# Altium PCB Ttem_Lumineux.PcbDoc
Units mil, origin at the board's own origin, x right, y up, seen from the top; angles counter-clockwise.
Board outline 6000 x 4000 mil, 2 copper layers (Top Layer, Bottom Layer); 53 components, 48 nets, 213 pads, 5 vias.
Unrouted connection lines stored in the file: 138.
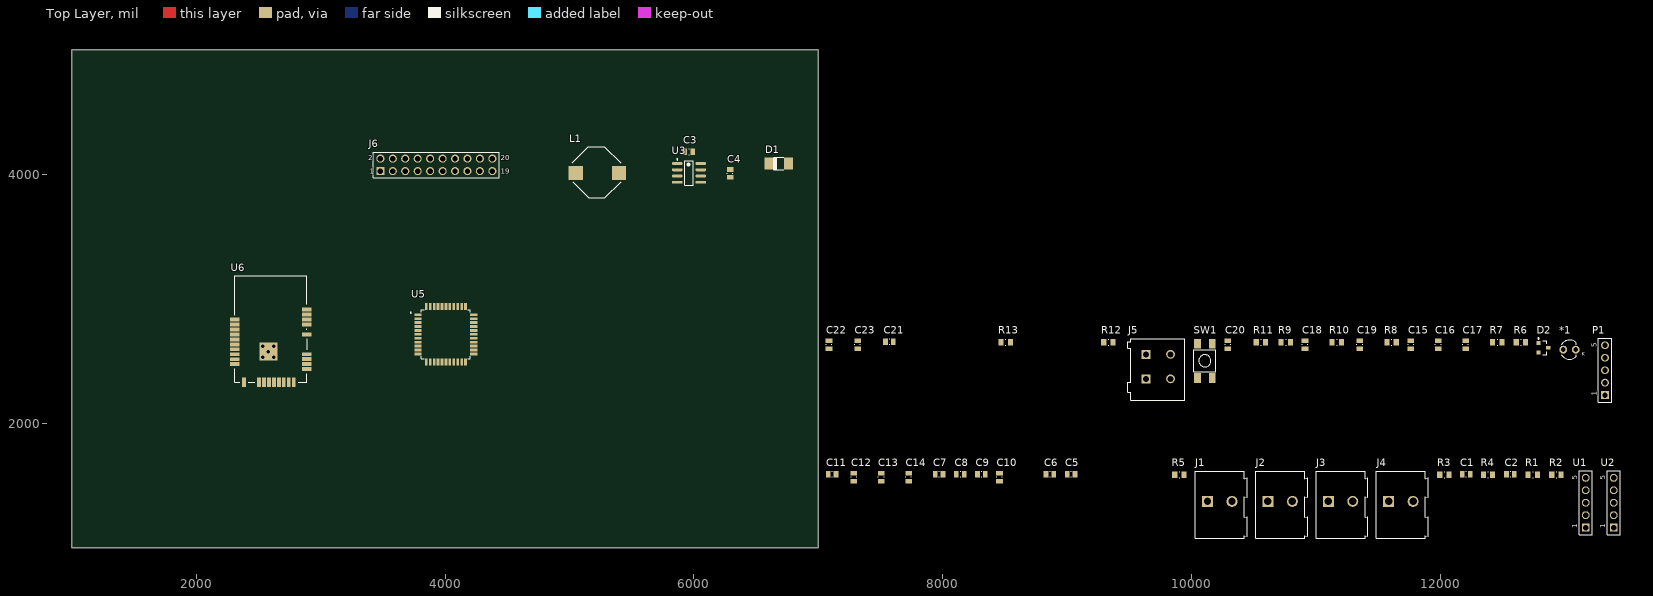
[diagram p0: Top Layer view]
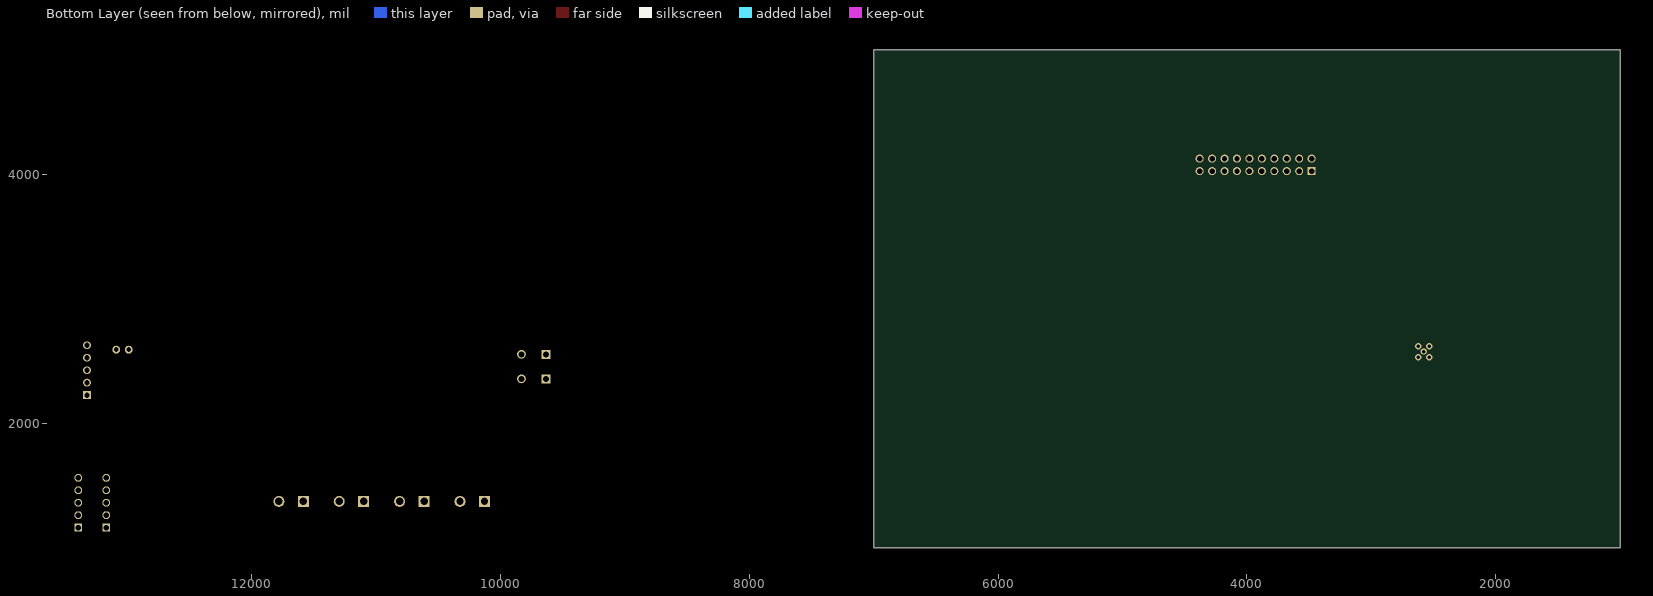
[diagram p1: Bottom Layer view, seen from below]

## Layer stack, top to bottom
Top Solder: solder mask 0.4, Solder Resist, Dk 3.5
Top Layer: signal copper 1.4
Dielectric 1: dielectric 12.6, FR-4, Dk 4.8
Bottom Layer: signal copper 1.4
Bottom Solder: solder mask 0.4, Solder Resist, Dk 3.5

## Board outline
1000,1000 7000,1000 7000,5000 1000,5000

## Design rules (kind name [scope] priority, off if disabled: settings)
Clearance [All] p1: gap=10 ignorepadtopadclearanceinfootprint=FALSE except(0: Arc-Hole Track-Hole SMDPad-Hole THPad-Hole Via-Hole Fill-Hole Poly-Hole Region-Hole Text-Hole)
PolygonConnect [All] p1: connectstyle=Relief reliefconductorwidth=10 reliefentries=4 polygonreliefangle="90 Angle" airgapwidth=10
RoutingVias [All] p1: holewidth=28 width=50 viastyle="Through Hole" minholewidth=28 minwidth=50 maxholewidth=28 maxwidth=50
SolderMaskExpansion [All] p1: expansion=4
Width [All] p1: maxlimit=10 minlimit=10 preferedwidth=10
30 further rules are at their usual default settings.

## Classes and differential pairs
component class Pic: *1 C15 C16 C17 C18 C19 C20 C21 C22 C23 D2 J5 P1 R6 R7 R8 R9 R10 R11 R12 R13 SW1 U5 U6
component class Alim: C1 C2 C3 C4 C5 C6 C7 C8 C9 C10 C11 C12 C13 C14 D1 J1 J2 J3 J4 J6 L1 R1 R2 R3 R4 R5 U1 U2 U3

## Components (designator, comment, footprint, x,y, rotation, side; value= is the part's Value field where it differs from the comment)
*1 "TEPT4400" "Type 3mm" 13035,2590 r0 top
C1 "39nF" CAPC0805(2012)155_L 12205,1590 r0 top value=4.7uF
C2 "39nF" CAPC0805(2012)155_L 12560,1590 r0 top value=4.7uF
C3 "10nF" CAPC0805(2012)155_L 5958.5,4180 r0 top value=4.7uF
C4 "100uf pol" CAPC0805(2012)155_L 6290,4006.5 r90 top value=4.7uF
C5 "100n" CAPC0805(2012)155_L 9030,1590 r0 top value=4.7uF
C6 "100uF pol" CAPC0805(2012)155_L 8860,1590 r0 top value=4.7uF
C7 "47uF" CAPC0805(2012)155_L 7970,1590 r0 top value=4.7uF
C8 "47uF" CAPC0805(2012)155_L 8140,1590 r0 top value=4.7uF
C9 "47uF" CAPC0805(2012)155_L 8310,1590 r0 top value=4.7uF
C10 "47uF" CAPC0805(2012)155_L 8455,1565 r90 top value=4.7uF
C11 "47uF" CAPC0805(2012)155_L 7110,1590 r0 top value=4.7uF
C12 "47uF" CAPC0805(2012)155_L 7285,1565 r90 top value=4.7uF
C13 "47uF" CAPC0805(2012)155_L 7505,1565 r90 top value=4.7uF
C14 "47uF" CAPC0805(2012)155_L 7725,1565 r90 top value=4.7uF
C15 "100n" CAPC0805(2012)155_L 11760,2630 r90 top value=4.7uF
C16 "100n" CAPC0805(2012)155_L 11980,2630 r90 top value=4.7uF
C17 "100n" CAPC0805(2012)155_L 12200,2630 r90 top value=4.7uF
C18 "" CAPC0805(2012)155_L 10910,2630 r90 top value=4.7uF
C19 "100n" CAPC0805(2012)155_L 11350,2630 r90 top value=4.7uF
C20 "100n" CAPC0805(2012)155_L 10290,2630 r90 top value=4.7uF
C21 "10u" CAPC0805(2012)155_L 7570,2655 r0 top value=4.7uF
C22 "100n" CAPC0805(2012)155_L 7085,2630 r90 top value=4.7uF
C23 "100n" CAPC0805(2012)155_L 7315,2630 r90 top value=4.7uF
D1 "SK32" DO-214AC 6680.28,4085 r0 top
D2 "BAS40-06LT1G" ONSC-SOT-23-3-318-08_V 12825,2605 r0 top
J1 "691211720002" 691211720002 10225,1345 r0 top
J2 "691211720002" 691211720002 10710,1345 r0 top
J3 "691211720002" 691211720002 11195,1345 r0 top
J4 "691211720002" 691211720002 11680,1345 r0 top
J5 "691411710002B" 691411710002B 9715,2430 r0 top
J6 "61302021121" 61302021121 3930,4075 r0 top
L1 "DO3308P-684" DO3308P 5340,4010 r180 top
P1 "61300511121" 61300511121 13320,2425 r90 top
R1 "47R" RESC0805(2012)_N 12740,1585 r0 top value="1000000.00 Ohm"
R2 "47R" RESC0805(2012)_N 12930,1585 r0 top value="1000000.00 Ohm"
R3 "270R" RESC0805(2012)_N 12030,1585 r0 top value="1000000.00 Ohm"
R4 "270R" RESC0805(2012)_N 12380,1585 r0 top value="1000000.00 Ohm"
R5 "shunt 0,2R max" RESC0805(2012)_N 9900,1585 r0 top value="1000000.00 Ohm"
R6 "" RESC0805(2012)_N 12645,2650 r0 top value="1000000.00 Ohm"
R7 "82k" RESC0805(2012)_N 12455,2650 r0 top value="1000000.00 Ohm"
R8 "" RESC0805(2012)_N 11605,2650 r0 top value="1000000.00 Ohm"
R9 "" RESC0805(2012)_N 10755,2650 r0 top value="1000000.00 Ohm"
R10 "18k" RESC0805(2012)_N 11165,2650 r0 top value="1000000.00 Ohm"
R11 "300R" RESC0805(2012)_N 10555,2650 r0 top value="1000000.00 Ohm"
R12 "0R" RESC0805(2012)_N 9330,2650 r0 top value="1000000.00 Ohm"
R13 "1M" RESC0805(2012)_N 8505,2650 r0 top value="1000000.00 Ohm"
SW1 "430181038816" 430181038816 10105,2500 r90 top
U1 "DC-DC _12to5V" 61300511121 13165,1360 r90 top
U2 "DC-DC _12to5V" 61300511121 13390,1360 r90 top
U3 "LM2674M-3.3" M08A_N 5960,4010 r0 top
U5 "PIC32MX130F256D" QFP80P1200X1200X120-44N 4006.77,2713.03 r0 top
U6 "ATWILC1000" ATWILC1000 2309.13,2328.15 r0 top

## Footprints (in the part's own frame and the unit in brackets; to place one, negate y for a bottom-side part, rotate by r counter-clockwise, add the part's x,y. Pads: shape width x height; smd on the part's side, far side on the other; paste and mask are expansions set on the pad)
61300511121 [mm] "Pin Header, pitch 2.54 mm, THT, Vertical, single row, 5p"
  rect 1.6x1.6 hole 1.1: 1(-5.08,0)
  round 1.6 hole 1.1: 2(-2.54,0) 3(0,0) 4(2.54,0) 5(5.08,0)
  silkscreen extent -6.5,-1.35 6.5,1.35, body extent -6.35,-1.27 6.35,1.27, height 8.57
61302021121 [mm] "Pin Header, pitch 2.54 mm, THT, Vertical, dual row, 20p"
  rect 1.65x1.65 hole 1.1: 1(-11.43,-1.27)
  round 1.65 hole 1.1: 2(-11.43,1.27) 3(-8.89,-1.27) 4(-8.89,1.27) 5(-6.35,-1.27) 6(-6.35,1.27) 7(-3.81,-1.27) 8(-3.81,1.27) 9(-1.27,-1.27) 10(-1.27,1.27) 11(1.27,-1.27) 12(1.27,1.27) 13(3.81,-1.27) 14(3.81,1.27) 15(6.35,-1.27) 16(6.35,1.27) 17(8.89,-1.27) 18(8.89,1.27) 19(11.43,-1.27) 20(11.43,1.27)
  silkscreen extent -12.85,-2.62 12.85,2.62, body extent -12.7,-2.54 12.7,2.54, height 8.59
430181038816 [mm] "4.5*4.5mm vertical type, SMD, height 3.8mm, black actuator, 160gf, T&R"
  rect 2x1.4 smd: 1(-3.5,1.5) 2(3.5,1.5) 3(-3.5,-1.5) 4(3.5,-1.5)
  silkscreen extent -2.25,-2.25 2.25,2.25, body extent -3.75,-2.25 3.75,2.25, height 3.78
691211720002 [mm] "5,00mm - modular - green -45° entry with rising cage clamp - 02p"
  rect 2.25x2.25 hole 1.5: 1(-2.5,0.65)
  round 2.25 hole 1.5: 2(2.5,0.65)
  silkscreen extent -5,-6.85 5.6,6.85, body extent -5,-6.85 5.6,6.85, height 15.72
691411710002B [mm] "5.00 mm Screwless Horizontal Entry - 2.0 mm2 Wires, 2p"
  rect 1.8x1.8 hole 1.2: 1(-2.1,-1.9) 1(-2.1,3.1)
  round 1.8 hole 1.2: 2(2.9,-1.9) 2(2.9,3.1)
  silkscreen extent -5.8,-6.3 5.8,6.3, body extent -5.8,-6.3 5.8,6.3, height 15.65
ATWILC1000 [mm]
  rect 1.9x0.8 smd: 1(14.73,2.67) 2(14.73,3.686) 3(14.73,4.702) 4(14.73,5.718) 5(14.73,9.782) 6(14.73,11.814) 7(14.73,12.83) 8(14.73,13.846) 9(14.73,14.862) 10(0,12.824) 11(0,11.808) 12(0,10.792) 13(0,9.776) 14(0,8.76) 15(0,7.744) 16(0,6.728) 17(0,5.712) 18(0,4.696) 19(0,3.68)
  rect 0.8x1.9 smd: 20(1.9,0) 21(4.948,0) 22(5.964,0) 23(6.98,0) 24(7.996,0) 25(9.012,0) 26(10.028,0) 27(11.044,0) 28(12.06,0)
  rect 3.7x3.7 smd: 29(6.88,6.27)
  silkscreen extent 0,0 14.73,21.72
CAPC0805(2012)155_L [mm] "Chip Capacitor, Body 2.0x1.2mm, Height 1.55mm, IPC High Density"
  rect 0.95x1.35 smd: 1(-0.8,0) 2(0.8,0)
  silkscreen extent -0.05,-0.58 0.05,0.58, body extent -1.1,-0.72 1.1,0.72, height 1.55
DO3308P [mm]
  rect 2.92x2.79 smd: 1(-1.46,0) 2(7.37,0)
  silkscreen extent -1.91,-5.33 8.13,5.08
DO-214AC [mm]
  rect 1.8x2.4 smd: A(2.025,0) C(-2.025,0)
  silkscreen extent -1.06,-1.3 1.02,1.3
M08A_N [mm] "SOIC, 8-Leads, Body 4.9x3.9mm, Pitch 1.27mm, IPC Medium Density"
  oval 2.2x0.6 smd: 1(-2.4,1.905) 2(-2.4,0.635) 3(-2.4,-0.635) 4(-2.4,-1.905) 5(2.4,-1.905) 6(2.4,-0.635) 7(2.4,0.635) 8(2.4,1.905)
  silkscreen extent -2.52,-2.5 0.9,2.88, body extent -2,-2.5 2,2.5, height 1.75
ONSC-SOT-23-3-318-08_V [mm] "SOT23, 3-Leads, Body 2.92x1.3mm, Pitch 0.95mm"
  rect 0.9x0.8 smd: 1(-1,0.95) 2(-1,-0.95) 3(1,0)
  silkscreen extent -1.12,-1.46 0.65,2.02, body extent -0.65,-1.46 0.65,1.46, height 1.11
QFP80P1200X1200X120-44N [mm]
  rect 1.47x0.55 smd: 1(-5.67,4) 2(-5.67,3.2) 3(-5.67,2.4) 4(-5.67,1.6) 5(-5.67,0.8) 6(-5.67,0) 7(-5.67,-0.8) 8(-5.67,-1.6) 9(-5.67,-2.4) 10(-5.67,-3.2) 11(-5.67,-4) 23(5.67,-4) 24(5.67,-3.2) 25(5.67,-2.4) 26(5.67,-1.6) 27(5.67,-0.8) 28(5.67,0) 29(5.67,0.8) 30(5.67,1.6) 31(5.67,2.4) 32(5.67,3.2) 33(5.67,4)
  rect 0.55x1.47 smd: 12(-4,-5.67) 13(-3.2,-5.67) 14(-2.4,-5.67) 15(-1.6,-5.67) 16(-0.8,-5.67) 17(0,-5.67) 18(0.8,-5.67) 19(1.6,-5.67) 20(2.4,-5.67) 21(3.2,-5.67) 22(4,-5.67) 34(4,5.67) 35(3.2,5.67) 36(2.4,5.67) 37(1.6,5.67) 38(0.8,5.67) 39(0,5.67) 40(-0.8,5.67) 41(-1.6,5.67) 42(-2.4,5.67) 43(-3.2,5.67) 44(-4,5.67)
  silkscreen extent -7.26,-5 5,5
RESC0805(2012)_N [mm] "Chip Resistor, Body 2.0x1.3mm, IPC Medium Density"
  rect 1.05x1.4 smd: 1(-0.95,0) 2(0.95,0)
  silkscreen extent -0.05,-0.6 0.05,0.6, body extent -1.1,-0.67 1.1,0.68, height 0.7
"Type 3mm" [mm] "THT, LED-3mm, 2pin- Body 4.15mm(max)"
  round 1.6 hole 1: 1(1.27,0) 2(-1.27,0)
  silkscreen extent -1.66,-1.95 1.4,1.95, body extent -1.93,-1.94 1.87,1.94, height 10.5

## Part data
C1 C2 C3 C4 C5 C6 C7 C8 C9 C10 C11 C12 C13 C14 C15 C16 C17 C18 C19 C20 C21 C22 C23: library part Capa, Case-EIA=0805, Case-Metric=2012, Rated Voltage="10 V", Tolerance=±10%, Max Thickness="1.55 mm", Technology=SMT
D1: "Shotky diod", Emitting color="Super Red", Manufacturer="Wuerth Elektronik", PartNumber=151031SS04000, ComponentLink1Description="Manufacturer URL", ComponentLink1URL=http://www.we-online.com, ComponentLink2Description=Datasheet, ComponentLink2URL=http://katalog.we-online.de/pbs/datasheet/7448042001.pdfhttp://katalog.we-online.de/pbs/datasheet/7448042001.pdfhttp://katalog.we-online.de/pbs/datasheet/7448042001.pdfhttp://katalog.we-online.de/pbs/datasheet/151031SS04000.pdf, PackageReference="Type 3mm"
D2: library part CMP-1055-00547-1, "Common Anode Schottky Barrier Diodes, 3-Pin SOT-23, Pb-Free, Tape and Reel", Manufacturer="On Semiconductor", ComponentLink1Description="Manufacturer URL", ComponentLink1URL=http://www.onsemi.com/, ComponentLink2Description=Datasheet, ComponentLink2URL=http://www.onsemi.cn/pub_link/Collateral/BAS40-06LT1-D.PDF, ComponentLink3Description="Package Specification", ComponentLink3URL=http://www.onsemi.cn/pub_link/Collateral/318-08.PDF, Configuration="Common Anode", DatasheetVersion="Rev. 8", Mounting Technology="Surface Mount", PackageDescription="3-Pin Small Outline Transistor, Body 2.92 x 1.3 mm, Pitch 0.95 mm", PackageReference=SOT-23-3-318-08, PackageVersion="Rev. AP, 11/2009", Packing="Tape and Reel", PartNumber=BAS40-06LT1G, RoHS=TRUE
J1 J2 J3 J4: library part CMP-1502-02524-1, "Serie 211 - 5.00 mm 45deg Entry Modular with Rising Cage Clamp - 15.50 mm Height WR-TBL, 2 pin", Manufacturer="Wurth Elektronik", Operating Temperature=-40to105degC, Datasheet URL=http://katalog.we-online.de/em/datasheet/6912117200xx.pdf, Manufacturer URL=http://www.we-online.de, Mounting Technology=THT, Package Reference=691211720002, Packaging=Box, Part Number=691211720002, Pin Number=2, Pitch=5.00mm, Publisher=WurthElektronik
J5: library part CMP-1502-03026-1, "Serie 411 B - 5.00mm Screwless Horizontal Entry-2.0mm2 Wires WR-TBL, 2 pin", Manufacturer="Wurth Elektronik", Operating Temperature=-40to105degC, Datasheet URL=http://katalog.we-online.de/em/datasheet/6914117100xxB.pdf, Manufacturer URL=http://www.we-online.de, Mounting Technology=THT, Package Reference=691411710002B, Packaging=Box, Part Number=691411710002B, Pin Number=2, Pitch=5.00mm, Publisher=WurthElektronik
J6: library part CMP-1502-01104-1, "THT Vertical Pin Header WR-PHD, Pitch 2.54 mm, Dual Row, 20 pins", Contact Resistance=20mOhm, Manufacturer="Wurth Elektronik", Operating Temperature=-40to105degC, Rated Current=3A, Withstanding Voltage=500VAC, Working Voltage=250VAC, Datasheet URL=https://katalog.we-online.de/em/datasheet/6130xx21121.pdf, Gender=Male, Manufacturer URL=http://www.we-online.de, Mounting Technology=THT, Orientation=Vertical, Package Reference=61302021121, Packaging=Bag, Part Number=61302021121, Pin Number=20, Pitch=2.54mm, Publisher=WurthElektronik, Row Number=Dual
P1: library part CMP-1502-01068-1, "THT Vertical Pin Header WR-PHD, Pitch 2.54 mm, Single Row, 5 pins", Contact Resistance=20mOhm, Manufacturer="Wurth Elektronik", Operating Temperature=-40to105degC, Rated Current=3A, Withstanding Voltage=500VAC, Working Voltage=250VAC, Datasheet URL=https://katalog.we-online.de/em/datasheet/6130xx11121.pdf, Gender=Male, Manufacturer URL=http://www.we-online.de, Mounting Technology=THT, Orientation=Vertical, Package Reference=61300511121, Packaging=Bag, Part Number=61300511121, Pin Number=5, Pitch=2.54mm, Publisher=WurthElektronik, Row Number=Single
R1 R2 R3 R4 R5 R6 R7 R8 R9 R10 R11 R12 R13: library part Resistor, Case-EIA=0805, Case-Metric=2012, Power="0.125 W", Tolerance="1 %", Technology=SMT
SW1: library part CMP-1454-00001-1, "WS-TASV SMD Tact Switch 4.5X4.5 mm", Manufacturer="Wuerth Elektronik", ComponentLink1Description="Manufacturer URL", ComponentLink1URL=http://www.we-online.com, ComponentLink2Description=Datasheet, ComponentLink2URL=http://katalog.we-online.de/em/datasheet/430181038816.pdf, NoPins=04, PackageReference=430181038816, PartNumber=430181038816
U3: library part CMP-0069-00679-2, "SIMPLE SWITCHER® Power Converter High Efficiency 500mA Step-Down Voltage Regulator, 8-pin Narrow SOIC", Manufacturer="National Semiconductor", PackageTopMarking=NSZXTT*2674*M3.3, PowerWise=N, Code_IPC=SOIC127P600-8, Code_JEDEC=MS-012-AA, ComponentLink1Description="LM2674 Datasheet", ComponentLink1URL=http://www.national.com/ds/LM/LM2674.pdf, ComponentLink2Description="LM2674 Web Page", ComponentLink2URL=http://www.national.com/pf/LM/LM2674.html, ComponentLink3Description="M08A Package Page", ComponentLink3URL=http://www.national.com/packaging/folders/m08a.html, CompType=Switcher, DatasheetVersion=Mar-2005, PackageDescription="SOIC Narrow, 4.9 x 3.9 x 1.45mm, 8 Lead, 1.27mm Pitch", PackageReference=M08A, PackageVersion="revM, May-2009", PinCount=8, RevisionNote="Component URLs added", RoHS=N
U5: Manufacturer=Microchip, PartNumber=PIC32MX130F064D-I/TL, ComponentLink1Description="Manufacturer URL", ComponentLink1URL=http://www.microchip.com, ComponentLink2Description=Datasheet, ComponentLink2URL=http://ww1.microchip.com/downloads/en/DeviceDoc/61168E.pdf, ComponentLink3Description="Package Specification", ComponentLink3URL=http://www.microchip.com/stellent/groups/techpub_sg/documents/packagingspec/en012702.pdf, ComponentLink4Description="Product URL", ComponentLink4URL=http://www.microchip.com/PIC32MX130F064D, DatasheetVersion="Rev. E", Mounting Technology="Surface Mount", PackageDescription="44-Lead Terminal Very Thin Leadless Array Package, 6 x 6 mm Body, 0.5 mm Pitch", PackageReference=VTLA-TL44, PackageVersion=C04-157C

## Via types
v1: diameter 50, hole 28, Top Layer to Bottom Layer, 5 vias

## Nets (pads, with @x,y where several pads share a name; then routed paths per layer and width w, separated by ;. In a path a pad name is that pad's centre, name@x,y a point inside that pad or via, vN(x,y) a via of type N, cw(c..) or ccw(c..) an arc to the next point about the centre after c; other vN are vias at no path point)
3V3: C5.1 C6.2 C15.2 C16.2 C17.2 C22.2 C23.2 D2.1 J6.20 L1.2 P1.2 R6.2 R13.2 U3.4 U5.17 U5.28 U5.40 U6.20 U6.23
5V_1: C7.1 C8.1 C9.1 C10.1 J1.1 J2.1 J6.19 R1.2 U1.4
5V_2: C11.1 C12.1 C13.1 C14.1 J3.1 J4.1 R2.2 U2.4
12Vbatt: C4.2 J6.17 R5.1 U1.2 U2.2 U3.7
GND: C4.1 C5.2 C6.1 C7.2 C8.2 C9.2 C10.2 C11.2 C12.2 C13.2 C14.2 C15.1 C16.1 C17.1 C18.1 C19.1 C20.1 C21.1 C22.1 C23.1 J1.2 J2.2 J3.2 J4.2 J5.2 J6.1 J6.2 P1.3 R3.1 R4.1 R10.1 R11.1 SW1.1 SW1.2 U1.3 U2.3 U3.6 U5.6 U5.16 U5.29 U5.39 U6.9 U6.12 U6.28 U6.29
  other v1: 2534.13,2528.15 2623.94,2528.15 2580,2575 2534.13,2618.15 2624.13,2618.15
Net*1_E: C20.2 R11.2 U5.26
NetC1_1: C1.1 R3.2 U1.5
NetC1_2: C1.2 R1.1
NetC2_1: C2.1 R2.1
NetC2_2: C2.2 R4.2 U2.5
NetC3_1: C3.1 U3.1
NetC3_2: C3.2 L1.1 U3.8
NetC18_2: C18.2 D2.3 R6.1 R8.2 R9.2
NetC19_2: C19.2 R7.1 R10.2 U5.25
NetC21_2: C21.2 U5.7
NetJ5_1: J5.1 R12.2
NetJ6_3: J6.3 U5.1
NetJ6_4: J6.4 U5.12
NetJ6_5: J6.5 U5.44
NetJ6_6: J6.6 U5.35
NetJ6_7: J6.7 U5.43
NetJ6_8: J6.8 U5.32
NetJ6_9: J6.9 U5.42
NetJ6_10: J6.10 U5.13
NetJ6_11: J6.11 U5.41
NetJ6_12: J6.12 U5.34
NetJ6_13: J6.13 U5.33
NetJ6_14: J6.14 U5.31
NetJ6_15: J6.15 U5.27
NetJ6_16: J6.16 U5.30
NetP1_1: P1.1 R8.1 U5.18
NetP1_4: P1.4 U5.21
NetP1_5: P1.5 U5.22
NetR9_1: R9.1 SW1.3 SW1.4
NetR12_1: R12.1 U5.23
NetR13_1: R13.1 U6.10
NetU1_1: U1.1 U2.1 U5.8
NetU4_3: 
NetU4_5: U5.24
NetU5_2: U5.2 U6.4
NetU5_3: U5.3 U6.11
NetU5_4: U5.4 U6.13
NetU5_5: U5.5 U6.22
NetU5_9: U5.9 U6.15
NetU5_14: U5.14 U6.18
NetU5_19: U5.19 U6.16
NetU5_20: U5.20 U6.17
Vbatt: J6.18 R5.2 R7.2
pads on no net: *1.1 *1.2 D1.A D1.C D2.2 U3.2 U3.3 U3.5 U5.10 U5.11 U5.15 U5.36 U5.37 U5.38 U6.1 U6.2 U6.3 U6.5 U6.6 U6.7 U6.8 U6.14 U6.19 U6.21 U6.24 U6.25 U6.26 U6.27

## Text inside footprints (layer, text, board x,y; h text height)
*1: Mechanical 15 "K" at 13135,2540 h30; Top Overlay "K" at 13135,2540 h30
J6: Top Overlay "20" at 4448.11,4110.43 h40; Top Overlay "19" at 4448.11,4004.13 h40; Top Overlay "1" at 3396.14,4004.13 h40; Top Overlay "2" at 3384.33,4110.43 h40
P1: Top Overlay "5" at 13253.07,2610.04 h40 r90; Top Overlay "1" at 13253.07,2220.28 h40 r90
U1: Top Overlay "1" at 13098.07,1155.28 h40 r90; Top Overlay "5" at 13098.07,1545.04 h40 r90
U2: Top Overlay "1" at 13323.07,1155.28 h40 r90; Top Overlay "5" at 13323.07,1545.04 h40 r90